# EAGLE board v1.0_not saved (EAGLE 8.2.1)

Size 183.5 x 101.27 mm. Coordinates in mm from the lower left corner, seen from the top.
Outline: 0,0 183.5,1.27 183.5,101.27 0,100 0,0
Copper layers (1*16): Top 0.035mm / dielectric 1.5mm / Bottom 0.035mm
Design rules "default": minimum track width 6mil, minimum drill 0.35mm, track to track 6mil, track to pad 6mil, pad to pad 6mil, via to via 6mil, smd to smd 6mil, copper to edge 40mil, drill to drill 6mil, minimum pad ring 10mil, minimum via ring 8mil, stop-mask expansion 4mil, vias tented up to drill 0mil, thermal gap 10mil

## Footprints (pad centres in the part's own frame; a part is rotated, then mirrored left to right if it is on the bottom)
BAT2P-13.5-CR1220 = drill 0.635 pad 1.524 long: +1 6.731,0; +2 -6.731,0 | smd 7.62 x 7.62: - 0,0
C0603 = smd 0.889 x 0.889: 1 0,0.762; 2 0,-0.762
C0402 = smd 0.5 x 0.5: 1 0,0.463; 2 0,-0.463
C0805 = smd 1.397 x 1.016: 1 0,0.889; 2 0,-0.889
AVX-A = smd 1.27 x 1.27: + -1.27,0; - 1.27,0
DO-214AA = smd 2.159 x 2.743: + -2.21,0; - 2.21,0
LED-0603 = smd 0.762 x 0.889: + -0.762,0; - 0.762,0
TH_5MM_14MM = drill 0.6: P$1 -2.54,0; P$2 2.54,0
F1206 = smd 1.27 x 1.778: 1 -1.397,0; 2 1.397,0
JST-XH-05-PACKAGE-ROUND-PAD = drill 1.016: 1 -5.08,0; 2 -2.54,0; 3 0,0; 4 2.54,0; 5 5.08,0
DCJ3P-11.6X9.6X7.0MM = drill 0.813 pad 1.524 long: + 4.381,10.16; - -4.128,10.16; CDN 1.206,10.16
MICRO-SD9+4P-SMD-16.1X14.5X1.85MM = smd 1.6 x 0.7: 1 0,2.25; 2 0,1.15; 3 0,0.05; 4 0,-1.05; 5 0,-2.15; 6 0,-3.25; 7 0,-4.35; 8 0,-5.45; 9 0,-6.55 | smd 1.6 x 1.4: G1 0.6,-7.85 | smd 2.2 x 1.4: G2 10.1,-7.85; G3 10.1,7.85 | smd 1.4 x 1.8: G4 0.5,6.95 | hole 0.9: 10.5,-4.95; 10.5,3.05
H2-2.54 = drill 0.889 pad 1.651 square: 1 0,1.27 | drill 0.889 pad 1.651: 2 0,-1.27
H16-2.54 = drill 0.889 pad 1.651 square: 1 0,-19.05 | drill 0.889 pad 1.651: 2 0,-16.51; 3 0,-13.97; 4 0,-11.43; 5 0,-8.89; 6 0,-6.35; 7 0,-3.81; 8 0,-1.27; 9 0,1.27; 10 0,3.81; 11 0,6.35; 12 0,8.89; 13 0,11.43; 14 0,13.97; 15 0,16.51; 16 0,19.05
H2X3-2.54 = drill 0.889 pad 1.651 square: 1 -1.27,2.54 | drill 0.889 pad 1.651: 2 -1.27,0; 3 -1.27,-2.54; 4 1.27,-2.54; 5 1.27,0; 6 1.27,2.54
H10-2.54 = drill 0.889 pad 1.651 square: 1 0,11.43 | drill 0.889 pad 1.651: 2 0,8.89; 3 0,6.35; 4 0,3.81; 5 0,1.27; 6 0,-1.27; 7 0,-3.81; 8 0,-6.35; 9 0,-8.89; 10 0,-11.43
L0805 = smd 1.016 x 1.397: 1 -0.889,0; 2 0.889,0
JST-XH-07-PACKAGE-ROUND-PAD = drill 1.016: 1 -7.62,0; 2 -5.08,0; 3 -2.54,0; 4 0,0; 5 2.54,0; 6 5.08,0; 7 7.62,0
RPI2 = drill 1.016 square: P$1 8.37,51.23; P$41 4.8,41.2 | drill 1.016: P$2 8.357,53.772; P$3 10.897,51.232; P$4 10.897,53.772; P$5 13.437,51.232; P$6 13.437,53.772; P$7 15.977,51.232; P$8 15.977,53.772; P$9 18.517,51.232; P$10 18.517,53.772; P$11 21.057,51.232; P$12 21.057,53.772; P$13 23.597,51.232; P$14 23.597,53.772; P$15 26.137,51.232; P$16 26.137,53.772; P$17 28.677,51.232; P$18 28.677,53.772; P$19 31.217,51.232; P$20 31.217,53.772; P$21 33.757,51.232; P$22 33.757,53.772; P$23 36.297,51.232; P$24 36.297,53.772; P$25 38.837,51.232; P$26 38.837,53.772; P$27 41.377,51.232; P$28 41.377,53.772; P$29 43.917,51.232; P$30 43.917,53.772; P$31 46.457,51.232; P$32 46.457,53.772; P$33 48.997,51.232; P$34 48.997,53.772; P$35 51.537,51.232; P$36 51.537,53.772; P$37 54.077,51.232; P$38 54.077,53.772; P$39 56.617,51.232; P$40 56.617,53.772; P$42 2.26,41.2 | hole 2.75: 3.5,3.5; 61.5,3.5; 3.5,52.5; 61.5,52.5
SOT-23 = smd 1.016 x 1.143: 1 -0.889,-1.016; 2 0.889,-1.016; 3 0,1.016
86SMX = smd 2.286 x 2.184: 1 -5.08,-2.286; 4 -5.08,2.286 | smd 3.556 x 2.184: 2 4.318,-2.286; 3 4.318,2.286
R0603 = smd 0.889 x 0.889: 1 0,0.762; 2 0,-0.762
PR-D2.3XL6.5MM = drill 0.813 octagon: 1 -4.953,0; 2 5.207,0
R0402 = smd 0.5 x 0.5: 1 0,0.463; 2 0,-0.463
SW2-12.7-12.0X3.6X3.6MM = drill 0.8 square: 1 6.35,0 | drill 0.8: 2 -6.35,0
B2,54 = smd 2.54 x 2.54: TP 0,0
SOIC127P1032X265-28N = smd 2.286 x 0.559: 1 -4.521,8.255; 2 -4.521,6.985; 3 -4.521,5.715; 4 -4.521,4.445; 5 -4.521,3.175; 6 -4.521,1.905; 7 -4.521,0.635; 8 -4.521,-0.635; 9 -4.521,-1.905; 10 -4.521,-3.175; 11 -4.521,-4.445; 12 -4.521,-5.715; 13 -4.521,-6.985; 14 -4.521,-8.255; 15 4.521,-8.255; 16 4.521,-6.985; 17 4.521,-5.715; 18 4.521,-4.445; 19 4.521,-3.175; 20 4.521,-1.905; 21 4.521,-0.635; 22 4.521,0.635; 23 4.521,1.905; 24 4.521,3.175; 25 4.521,4.445; 26 4.521,5.715; 27 4.521,6.985; 28 4.521,8.255
SOIC127P600X175-8N = smd 2.184 x 0.559: 1 -2.362,1.905; 2 -2.362,0.635; 3 -2.362,-0.635; 4 -2.362,-1.905; 5 2.362,-1.905; 6 2.362,-0.635; 7 2.362,0.635; 8 2.362,1.905
LOPY = drill 0.6: P$1 -8.89,16.51; P$2 -8.89,13.97; P$3 -8.89,11.43; P$4 -8.89,8.89; P$5 -8.89,6.35; P$6 -8.89,3.81; P$7 -8.89,1.27; P$8 -8.89,-1.27; P$9 -8.89,-3.81; P$10 -8.89,-6.35; P$11 -8.89,-8.89; P$12 -8.89,-11.43; P$13 -8.89,-13.97; P$14 -8.89,-16.51; P$15 8.89,-16.51; P$16 8.89,-13.97; P$17 8.89,-11.43; P$18 8.89,-8.89; P$19 8.89,-6.35; P$20 8.89,-3.81; P$21 8.89,-1.27; P$22 8.89,1.27; P$23 8.89,3.81; P$24 8.89,6.35; P$25 8.89,8.89; P$26 8.89,11.43; P$27 8.89,13.97; P$28 8.89,16.51
SSOP28-0.65-10.2X5.2MM = smd 0.4 x 1.5: 1 -4.225,-3.625; 2 -3.575,-3.625; 3 -2.925,-3.625; 4 -2.275,-3.625; 5 -1.625,-3.625; 6 -0.975,-3.625; 7 -0.325,-3.625; 8 0.325,-3.625; 9 0.975,-3.625; 10 1.625,-3.625; 11 2.275,-3.625; 12 2.925,-3.625; 13 3.575,-3.625; 14 4.225,-3.625; 15 4.225,3.625; 16 3.575,3.625; 17 2.925,3.625; 18 2.275,3.625; 19 1.625,3.625; 20 0.975,3.625; 21 0.325,3.625; 22 -0.325,3.625; 23 -0.975,3.625; 24 -1.625,3.625; 25 -2.275,3.625; 26 -2.925,3.625; 27 -3.575,3.625; 28 -4.225,3.625
SCK28-2.54-35.6X10MM = drill 1 pad 1.7 square: 1 -16.51,-3.81 | drill 1 pad 1.7: 2 -13.97,-3.81; 3 -11.43,-3.81; 4 -8.89,-3.81; 5 -6.35,-3.81; 6 -3.81,-3.81; 7 -1.27,-3.81; 8 1.27,-3.81; 9 3.81,-3.81; 10 6.35,-3.81; 11 8.89,-3.81; 12 11.43,-3.81; 13 13.97,-3.81; 14 16.51,-3.81; 15 16.51,3.81; 16 13.97,3.81; 17 11.43,3.81; 18 8.89,3.81; 19 6.35,3.81; 20 3.81,3.81; 21 1.27,3.81; 22 -1.27,3.81; 23 -3.81,3.81; 24 -6.35,3.81; 25 -8.89,3.81; 26 -11.43,3.81; 27 -13.97,3.81; 28 -16.51,3.81
SOP8 = smd 1 x 0.5: 1 -2.8,1.905; 2 -2.8,0.635; 3 -2.8,-0.635; 4 -2.8,-1.905; 5 2.8,-1.905; 6 2.8,-0.635; 7 2.8,0.635; 8 2.8,1.905
DIP254P762X420-16 = drill 1.118 square: 1 -7.62,17.78 | drill 1.118: 2 -7.62,15.24; 3 -7.62,12.7; 4 -7.62,10.16; 5 -7.62,7.62; 6 -7.62,5.08; 7 -7.62,2.54; 8 -7.62,0; 9 0,0; 10 0,2.54; 11 0,5.08; 12 0,7.62; 13 0,10.16; 14 0,12.7; 15 0,15.24; 16 0,17.78
SOT91P240X110-3N = smd 1.321 x 0.559: 1 -1.016,0.914; 2 -1.016,-0.914; 3 1.016,0
SOIC127P600X175-8N' = smd 1.981 x 0.533: 1 -2.464,1.905; 2 -2.464,0.635; 3 -2.464,-0.635; 4 -2.464,-1.905; 5 2.464,-1.905; 6 2.464,-0.635; 7 2.464,0.635; 8 2.464,1.905
SOIC127P600X175-14N = smd 1.981 x 0.559: 1 -2.362,3.81; 2 -2.362,2.54; 3 -2.362,1.27; 4 -2.362,0; 5 -2.362,-1.27; 6 -2.362,-2.54; 7 -2.362,-3.81; 8 2.362,-3.81; 9 2.362,-2.54; 10 2.362,-1.27; 11 2.362,0; 12 2.362,1.27; 13 2.362,2.54; 14 2.362,3.81
TO-225AA = drill 0.813 long: 1 -4.921,-8.89; 2 -2.54,-8.89; 3 -0.159,-8.89 | hole 3.302: -2.54,2.54
TO-263 = smd 1.067 x 2.159: 1 -2.54,-8.331; 2 0,-8.331; 3 2.54,-8.331 | smd 10.8 x 10.41: TAB 0,0
LM2596S = drill 0.65 pad 2.54 square: P$1 1.841,-1.968; P$2 1.841,-19.113; P$3 41.339,-1.968; P$4 41.339,-19.113 | hole 4.8: 8.445,-2.54 | hole 4.9: 34.734,-18.542
FE1.1S_SSOP-28 = smd 0.35 x 1.5: 1 -4.16,-2.7; 2 -3.52,-2.7; 3 -2.88,-2.7; 4 -2.24,-2.7; 5 -1.6,-2.7; 6 -0.96,-2.7; 7 -0.32,-2.7; 8 0.32,-2.7; 9 0.96,-2.7; 10 1.6,-2.7; 11 2.24,-2.7; 12 2.88,-2.7; 13 3.52,-2.7; 14 4.16,-2.7; 15 4.16,2.7; 16 3.52,2.7; 17 2.88,2.7; 18 2.24,2.7; 19 1.6,2.7; 20 0.96,2.7; 21 0.32,2.7; 22 -0.3,2.7; 23 -0.96,2.7; 24 -1.6,2.7; 25 -2.24,2.7; 26 -2.88,2.7; 27 -3.52,2.7; 28 -4.16,2.7
MICRO-USB5+6P-SMD-0.65-AB = smd 0.4 x 1.35: 1 -1.3,2.875; 2 -0.65,2.875; 3 0,2.875; 4 0.65,2.875; 5 1.3,2.875 | smd 1.9 x 1.9: P1 -1.2,0; P2 1.2,0 | drill 0.508 pad 1.016 long: P3 -3.625,0; P4 3.625,0 | drill 0.8: P5 -2.425,2.73; P6 2.425,2.73
X2-SMD-5.0X3.2X1.3MM = smd 1.778 x 2.032: 1 -2.159,0; 2 2.159,0

## Placement (x,y rotation side)
BAT1  cr1220  [BAT2P-13.5-CR1220]  7.62,6.99 0 top
C1  10pf  [C0603]  167.64,50.16 90 top
C2  100nf  [C0603]  161.29,48.26 0 top
C3  10pf  [C0603]  163.83,48.9 90 top
C4  10uf  [C0603]  130.81,17.14 0 top
C5  1UF 6.3V  [C0402]  152.4,40.64 0 top
C6  100nf  [C0603]  -10.79,58.42 0 top  (outside the outline)
C7  100nf  [C0603]  -15.88,58.42 0 top  (outside the outline)
C8  1UF 6.3V  [C0402]  152.4,37.47 0 top
C9  10nf  [C0805]  173.99,52.07 0 top
C10  10uf  [AVX-A]  44.45,59.69 0 top
C11  100nf  [C0603]  -20.95,58.42 0 top  (outside the outline)
C12  100nf  [C0603]  -26.04,58.42 0 top  (outside the outline)
C13  100nf  [C0603]  -31.11,58.42 0 top  (outside the outline)
C14  100nf  [C0603]  34.92,71.12 0 top
C15  100nf  [C0603]  -3.81,38.1 0 top  (outside the outline)
C16  100nf  [C0603]  -8.89,38.1 0 top  (outside the outline)
C17  4.7uf  [C0603]  -12.7,38.1 0 top  (outside the outline)
C18  100nf  [C0603]  -16.51,38.1 0 top  (outside the outline)
C19  100nf  [C0603]  -20.32,38.1 0 top  (outside the outline)
C28  100nf  [C0603]  -24.13,38.1 0 top  (outside the outline)
C29  100nf  [C0603]  -27.94,38.1 0 top  (outside the outline)
C30  4.7uf  [C0603]  -30.48,38.1 0 top  (outside the outline)
C31  100nf  [C0805]  168.28,48.26 90 top
C32  10uf  [C0805]  69.85,28.57 0 top
C33  10uf  [C0805]  122.56,27.94 0 top
C34  10uf  [C0805]  120.02,27.94 0 top
C35  100nf  [C0603]  114.3,35.56 0 top
C36  100nf  [C0603]  125.09,28.57 90 top
C38  100nf  [C0603]  140.34,50.16 90 top
C39  100nf  [C0603]  -3.17,43.18 0 top  (outside the outline)
C40  4.7uf  [C0603]  128.27,50.16 90 top
C42  100nf  [C0603]  -8.26,43.18 0 top  (outside the outline)
C43  100nf  [C0603]  -11.43,48.9 0 top  (outside the outline)
C44  4.7uf  [C0603]  -13.34,44.45 0 top  (outside the outline)
C46  100nf  [C0603]  -17.14,44.45 0 top  (outside the outline)
C47  100nf  [C0603]  -22.86,44.45 0 top  (outside the outline)
C48  4.7uf  [C0603]  -6.99,22.86 0 top  (outside the outline)
D1  28V-5A  [DO-214AA]  93.34,21.59 0 top
D2  BLUE-0603  [LED-0603]  25.4,45.72 0 top
D3  GREEN-0603  [LED-0603]  25.4,59.05 0 top
D4  RED-0603  [LED-0603]  25.4,35.56 0 top
D5  RED-0603  [LED-0603]  25.4,33.02 0 top
D6  RED-0603  [LED-0603]  25.4,63.5 0 top
D7  BLUE-0603  [LED-0603]  25.4,43.18 0 top
D8  RED-0603  [LED-0603]  25.4,30.48 0 top
D9  RED-0603  [LED-0603]  25.4,68.58 0 top
D10  RED-0603  [LED-0603]  25.4,27.94 0 top
D11  BLUE-0603  [LED-0603]  25.4,66.04 0 top
D13  RED-0603  [LED-0603]  25.4,25.4 0 top
D14  RED-0603  [LED-0603]  25.4,22.86 0 top
D15  GREEN-0603  [LED-0603]  25.4,56.52 0 top
D16  BLUE-0603  [LED-0603]  88.9,29.84 0 top
D17  GREEN-0603  [LED-0603]  25.4,53.34 0 top
D18  BLUE-0603  [LED-0603]  25.4,40.64 0 top
D19  GREEN-0603  [LED-0603]  25.4,50.8 0 top
D20  BLUE-0603  [LED-0603]  25.4,38.1 0 top
D21  GREEN-0603  [LED-0603]  25.4,48.26 0 top
F1  307010005_DIP_PPTC_4A_0310  [TH_5MM_14MM]  92.08,20.32 0 top
F2  SMD1206R500SF  [F1206]  24.13,91.44 0 top
F3  SMD1206R500SF  [F1206]  29.21,91.44 0 top
F4  SMD1206R500SF  [F1206]  45.72,91.44 0 top
F5  SMD1206R500SF  [F1206]  5.08,81.28 0 top
F6  SMD1206R500SF  [F1206]  10.16,81.28 0 top
F7  SMD1206R500SF  [F1206]  20.32,81.28 0 top
F8  SMD1206R500SF  [F1206]  25.4,81.28 0 top
F9  SMD1206R500SF  [F1206]  36.83,81.28 0 top
F10  SMD1206R500SF  [F1206]  41.91,81.28 0 top
F11  SMD1206R500SF  [F1206]  52.07,81.28 0 top
F12  SMD1206R500SF  [F1206]  57.15,81.28 0 top
F13  SMD1206R500SF  [F1206]  85.09,81.28 0 top
F14  SMD1206R500SF  [F1206]  88.9,81.28 0 top
F15  SMD1206R500SF  [F1206]  135.89,81.28 0 top
F16  SMD1206R500SF  [F1206]  140.97,81.28 0 top
F17  SMD1206R500SF  [F1206]  119.38,81.28 0 top
F18  SMD1206R500SF  [F1206]  124.46,81.28 0 top
F19  SMD1206R500SF  [F1206]  102.87,81.28 0 top
F20  SMD1206R500SF  [F1206]  107.95,81.28 0 top
F21  SMD1206R500SF  [F1206]  69.85,81.28 0 top
F22  SMD1206R500SF  [F1206]  74.93,81.28 0 top
F23  SMD1206R500SF  [F1206]  50.8,91.44 0 top
F24  SMD1206R500SF  [F1206]  63.5,91.44 0 top
F25  SMD1206R500SF  [F1206]  68.58,91.44 0 top
F26  SMD1206R500SF  [F1206]  85.09,91.44 0 top
F27  SMD1206R500SF  [F1206]  90.17,91.44 0 top
F28  SMD1206R500SF  [F1206]  3.81,91.44 0 top
F29  SMD1206R500SF  [F1206]  8.89,91.44 0 top
F30  SMD1206R500SF  [F1206]  106.68,91.44 0 top
F31  SMD1206R500SF  [F1206]  111.76,91.44 0 top
F32  SMD1206R500SF  [F1206]  127,91.44 0 top
F33  SMD1206R500SF  [F1206]  132.08,91.44 0 top
F34  SMD1206R500SF  [F1206]  146.05,91.44 0 top
F35  SMD1206R500SF  [F1206]  151.13,91.44 0 top
F36  SMD1206R500SF  [F1206]  152.4,81.28 0 top
F37  SMD1206R500SF  [F1206]  157.48,81.28 0 top
F38  SMD1206R500SF  [F1206]  49.53,72.39 0 top
F39  SMD1206R500SF  [F1206]  54.61,72.39 0 top
F40  SMD1206R500SF  [F1206]  69.85,72.39 0 top
F41  SMD1206R500SF  [F1206]  74.93,72.39 0 top
F42  SMD1206R500SF  [F1206]  25.4,72.39 0 top
F43  SMD1206R500SF  [F1206]  30.48,72.39 0 top
F44  SMD1206R500SF  [F1206]  3.81,72.39 0 top
F45  SMD1206R500SF  [F1206]  8.89,72.39 0 top
F46  SMD1206R500SF  [F1206]  92.71,72.39 0 top
F47  SMD1206R500SF  [F1206]  97.79,72.39 0 top
F48  SMD1206R500SF  [F1206]  125.73,72.39 0 top
F49  SMD1206R500SF  [F1206]  130.81,72.39 0 top
F50  SMD1206R500SF  [F1206]  109.22,72.39 0 top
F51  SMD1206R500SF  [F1206]  114.3,72.39 0 top
F52  SMD1206R500SF  [F1206]  143.51,72.39 0 top
F53  SMD1206R500SF  [F1206]  148.59,72.39 0 top
F54  SMD1206R500SF  [F1206]  160.02,72.39 0 top
F55  SMD1206R500SF  [F1206]  165.1,72.39 0 top
F56  SMD1206R500SF  [F1206]  60.33,36.83 0 top
F57  SMD1206R500SF  [F1206]  60.33,30.48 0 top
F58  SMD1206R500SF  [F1206]  60.33,24.13 0 top
F74  SMD1206R500SF  [F1206]  33.66,60.33 0 top
F75  SMD1206R500SF  [F1206]  38.73,60.96 0 top
F76  SMD1206R500SF  [F1206]  39.37,71.12 0 top
F77  SMD1206R500SF  [F1206]  44.45,71.12 0 top
F78  SMD1206R500SF  [F1206]  54.61,60.96 0 top
F79  SMD1206R500SF  [F1206]  59.69,60.96 0 top
F80  SMD1206R500SF  [F1206]  50.8,50.8 0 top
F81  SMD1206R500SF  [F1206]  55.88,50.8 0 top
F82  SMD1206R500SF  [F1206]  33.02,50.8 0 top
F83  SMD1206R500SF  [F1206]  38.1,50.8 0 top
I2C_1  JST-XH-05-PIN-ROUND-PAD  [JST-XH-05-PACKAGE-ROUND-PAD]  8.89,85.09 0 top
I2C_2  JST-XH-05-PIN-ROUND-PAD  [JST-XH-05-PACKAGE-ROUND-PAD]  25.4,85.09 0 top
I2C_3  JST-XH-05-PIN-ROUND-PAD  [JST-XH-05-PACKAGE-ROUND-PAD]  41.91,85.09 0 top
I2C_4  JST-XH-05-PIN-ROUND-PAD  [JST-XH-05-PACKAGE-ROUND-PAD]  58.42,85.09 0 top
I2C_5  JST-XH-05-PIN-ROUND-PAD  [JST-XH-05-PACKAGE-ROUND-PAD]  74.93,85.09 0 top
I2C_6  JST-XH-05-PIN-ROUND-PAD  [JST-XH-05-PACKAGE-ROUND-PAD]  91.44,85.09 0 top
I2C_7  JST-XH-05-PIN-ROUND-PAD  [JST-XH-05-PACKAGE-ROUND-PAD]  140.97,85.09 0 top
I2C_8  JST-XH-05-PIN-ROUND-PAD  [JST-XH-05-PACKAGE-ROUND-PAD]  124.46,85.09 0 top
I2C_9  JST-XH-05-PIN-ROUND-PAD  [JST-XH-05-PACKAGE-ROUND-PAD]  107.95,85.09 0 top
I2C_10  JST-XH-05-PIN-ROUND-PAD  [JST-XH-05-PACKAGE-ROUND-PAD]  157.48,85.09 0 top
I_UART_HUB_1  JST-XH-05-PIN-ROUND-PAD  [JST-XH-05-PACKAGE-ROUND-PAD]  132.08,76.2 0 top
J1  DC-044-A  [DCJ3P-11.6X9.6X7.0MM]  121.92,1.91 0 top
J2  MICROSD-9P  [MICRO-SD9+4P-SMD-16.1X14.5X1.85MM]  169.54,66.67 0 top
J3  2p-2.54  [H2-2.54]  116.2,59.69 0 top
J4  2p-2.54  [H2-2.54]  109.22,67.31 0 top
J5  16p-2.54  [H16-2.54]  132.08,67.31 90 top
J6  16p-2.54  [H16-2.54]  132.08,63.5 90 top
J7  2x3p-2.54  [H2X3-2.54]  158.75,64.77 90 top
J8  2p-2.54  [H2-2.54]  109.22,60.96 0 top
J9  10p-2.54  [H10-2.54]  151.13,-3.81 90 top  (outside the outline)
J10  10p-2.54  [H10-2.54]  125.73,-3.81 90 top  (outside the outline)
J11  10p-2.54  [H10-2.54]  151.13,-6.35 90 top  (outside the outline)
J12  10p-2.54  [H10-2.54]  125.73,-6.35 90 top  (outside the outline)
L1  330R-1500MA  [L0805]  180.34,46.35 0 top
L2  330R-1500MA  [L0805]  99.06,53.98 0 top
L3  330R-1500MA  [L0805]  50.8,35.56 0 top
LOPY_I2C  JST-XH-05-PIN-ROUND-PAD  [JST-XH-05-PACKAGE-ROUND-PAD]  59.69,64.77 0 top
LOPY_SPI  JST-XH-07-PIN-ROUND-PAD  [JST-XH-07-PACKAGE-ROUND-PAD]  40.64,64.77 0 top
LOPY_UART0  JST-XH-05-PIN-ROUND-PAD  [JST-XH-05-PACKAGE-ROUND-PAD]  55.88,54.61 0 top
LOPY_UART1  JST-XH-05-PIN-ROUND-PAD  [JST-XH-05-PACKAGE-ROUND-PAD]  38.1,54.61 0 top
PCB1  RPI2  [RPI2]  96.52,1.27 0 top
PI_ADC_1  JST-XH-07-PIN-ROUND-PAD  [JST-XH-07-PACKAGE-ROUND-PAD]  77.47,76.2 0 top
PI_ADC_2  JST-XH-07-PIN-ROUND-PAD  [JST-XH-07-PACKAGE-ROUND-PAD]  54.61,76.2 0 top
PI_ADC_3  JST-XH-07-PIN-ROUND-PAD  [JST-XH-07-PACKAGE-ROUND-PAD]  33.02,76.2 0 top
PI_ADC_4  JST-XH-07-PIN-ROUND-PAD  [JST-XH-07-PACKAGE-ROUND-PAD]  11.43,76.2 0 top
PI_RS_485  JST-XH-05-PIN-ROUND-PAD  [JST-XH-05-PACKAGE-ROUND-PAD]  97.79,76.2 0 top
PI_UART  JST-XH-05-PIN-ROUND-PAD  [JST-XH-05-PACKAGE-ROUND-PAD]  115.57,76.2 0 top
PI_UART_HUB_2  JST-XH-05-PIN-ROUND-PAD  [JST-XH-05-PACKAGE-ROUND-PAD]  148.59,76.2 0 top
PI_UART_HUB_3  JST-XH-05-PIN-ROUND-PAD  [JST-XH-05-PACKAGE-ROUND-PAD]  165.1,76.2 0 top
Q2  SSM3J328R,LF  [SOT-23]  55.88,42.55 0 top
Q3  6pF@32.7680kHz  [86SMX]  175.9,53.98 0 top
Q4  BSS138W-7-F  [SOT-23]  51.44,42.55 0 top
Q5  SSM3J328R,LF  [SOT-23]  60.33,42.55 0 top
R1  330R  [R0603]  -1.91,52.07 0 top
R2  10K 1/10W  [R0603]  165.1,46.99 90 top
R3  330R  [R0603]  -6.99,52.07 0 top  (outside the outline)
R4  4.7K  [R0603]  -12.06,52.07 0 top  (outside the outline)
R5  1K  [R0603]  -17.14,52.07 0 top  (outside the outline)
R6  220R  [PR-D2.3XL6.5MM]  33.66,33.02 0 top
R7  330K  [PR-D2.3XL6.5MM]  122.56,17.14 0 top
R8  10K  [R0603]  -22.23,52.07 0 top  (outside the outline)
R9  100R  [PR-D2.3XL6.5MM]  33.66,30.48 0 top
R10  100R  [PR-D2.3XL6.5MM]  31.11,69.85 0 top
R11  1K  [R0603]  -27.3,52.07 0 top  (outside the outline)
R12  4.7K  [R0603]  -32.38,52.07 0 top  (outside the outline)
R13  10K  [R0603]  44.45,57.78 0 top
R14  4.7K  [R0603]  135.89,50.16 90 top
R15  10K  [R0603]  132.08,50.16 90 top
R18  10K  [R0603]  159.38,29.21 0 top
R19  10K  [R0603]  170.81,46.99 90 top
R20  15K 1/10W  [R0603]  114.3,31.11 0 top
R21  220R  [PR-D2.3XL6.5MM]  34.29,24.77 0 top
R22  100R  [PR-D2.3XL6.5MM]  33.66,22.23 0 top
R23  330R  [R0603]  -25.4,31.75 0 top  (outside the outline)
R24  330R  [R0603]  -30.48,31.75 0 top  (outside the outline)
R25  4.7K  [R0603]  151.13,50.16 90 top
R26  10K  [R0603]  146.69,50.16 90 top
R27  10K  [R0603]  98.42,32.38 0 top
R28  2.7K 1/16W  [R0402]  128.27,35.56 0 top
R29  330R  [R0603]  97.79,24.77 0 top
R30  330R  [R0603]  28.57,53.34 90 top
R31  330R  [R0603]  28.57,40.64 90 top
R32  330R  [R0603]  28.57,50.8 90 top
R33  330R  [R0603]  28.57,38.1 90 top
R34  330R  [R0603]  28.57,48.26 90 top
R35  1K  [R0603]  28.57,66.04 90 top
R36  1M  [R0603]  153.03,29.84 0 top
R37  3.9K  [R0603]  152.4,34.29 0 top
R38  3.9K  [R0603]  150.5,31.11 0 top
R39  100K 1/10W  [R0603]  25.4,60.96 90 top
R40  100K 1/10W  [R0603]  50.8,38.73 90 top
SPI_1  JST-XH-07-PIN-ROUND-PAD  [JST-XH-07-PACKAGE-ROUND-PAD]  11.43,95.25 0 top
SPI_2  JST-XH-07-PIN-ROUND-PAD  [JST-XH-07-PACKAGE-ROUND-PAD]  31.75,95.25 0 top
SPI_3  JST-XH-07-PIN-ROUND-PAD  [JST-XH-07-PACKAGE-ROUND-PAD]  52.07,95.25 0 top
SPI_4  JST-XH-07-PIN-ROUND-PAD  [JST-XH-07-PACKAGE-ROUND-PAD]  72.39,95.25 0 top
SPI_5  JST-XH-07-PIN-ROUND-PAD  [JST-XH-07-PACKAGE-ROUND-PAD]  93.98,95.25 0 top
SPI_6  JST-XH-07-PIN-ROUND-PAD  [JST-XH-07-PACKAGE-ROUND-PAD]  115.57,95.25 0 top
SPI_7  JST-XH-07-PIN-ROUND-PAD  [JST-XH-07-PACKAGE-ROUND-PAD]  137.16,95.25 0 top
SPI_8  JST-XH-07-PIN-ROUND-PAD  [JST-XH-07-PACKAGE-ROUND-PAD]  160.02,95.25 0 top
SW1  SW-200D  [SW2-12.7-12.0X3.6X3.6MM]  87.63,38.1 0 top
SW2  SW-200D  [SW2-12.7-12.0X3.6X3.6MM]  71.12,44.45 0 top
SW3  SW-200D  [SW2-12.7-12.0X3.6X3.6MM]  71.12,38.1 0 top
SW4  SW-200D  [SW2-12.7-12.0X3.6X3.6MM]  71.75,55.88 0 top
SW5  SW-200D  [SW2-12.7-12.0X3.6X3.6MM]  87.63,55.88 0 top
SW6  SW-200D  [SW2-12.7-12.0X3.6X3.6MM]  87.63,44.45 0 top
SW7  SW-200D  [SW2-12.7-12.0X3.6X3.6MM]  71.12,50.16 0 top
SW8  SW-200D  [SW2-12.7-12.0X3.6X3.6MM]  87.63,49.53 0 top
TP1  TPB2,54  [B2,54]  37.47,46.99 0 top
TP2  TPB2,54  [B2,54]  50.16,46.99 0 top
TP3  TPB2,54  [B2,54]  46.99,46.99 0 top
TP4  TPB2,54  [B2,54]  53.34,46.99 0 top
TP5  TPB2,54  [B2,54]  34.29,46.99 0 top
TP6  TPB2,54  [B2,54]  43.81,46.99 0 top
TP7  TPB2,54  [B2,54]  40.64,46.99 0 top
U1  MCP23017-E/SO  [SOIC127P1032X265-28N]  167,36.2 0 top
U2  MCP79412-I/SN  [SOIC127P600X175-8N]  165.1,53.98 0 top
U3  LOPY  [LOPY]  12.7,43.18 0 top
U5  FT232RL-SSOP28  [SSOP28-0.65-10.2X5.2MM]  147.96,44.45 0 top
U6  FT232RL-SSOP28  [SSOP28-0.65-10.2X5.2MM]  137.16,44.45 0 top
U7  2x14p-2.54  [SCK28-2.54-35.6X10MM]  87.63,64.77 0 top
U8  BR24G32-3  [SOP8]  147.96,36.2 0 top
U10  74HC139N  [DIP254P762X420-16]  181.61,31.75 0 top
U11  BZX84C30  [SOT91P240X110-3N]  92.71,26.04 0 top
U12  SP483ECN-L  [SOIC127P600X175-8N']  102.87,31.75 0 top
U13  FT232RL-SSOP28  [SSOP28-0.65-10.2X5.2MM]  125.73,43.81 0 top
U14  FT232RL-SSOP28  [SSOP28-0.65-10.2X5.2MM]  114.94,43.81 0 top
U15  FT232RL-SSOP28  [SSOP28-0.65-10.2X5.2MM]  103.5,43.81 0 top
U$1  MCP3424-E/SL  [SOIC127P600X175-14N]  156.84,36.2 0 top
U$2  MCP3424-E/SL  [SOIC127P600X175-14N]  156.84,46.35 0 top
U$3  C106DG  [TO-225AA]  111.76,20.32 0 top
U$4  MCR29300  [TO-263]  83.82,10.16 0 top
U$5  LM2596S  [LM2596S]  34.29,21.59 0 top
U$6  FE1.1S  [FE1.1S_SSOP-28]  121.28,33.66 0 top
USB1  ZX62-B-5PA  [MICRO-USB5+6P-SMD-0.65-AB]  182.25,95.25 90 top
USB3  ZX62-B-5PA  [MICRO-USB5+6P-SMD-0.65-AB]  182.25,87.63 90 top
Y2  12MHZ  [X2-SMD-5.0X3.2X1.3MM]  121.92,24.13 0 top

## Library data of the parts
BAT1 = Seeed-Connector -2016
C1 C3 = Seeed-Capacitor; MPN: CC0603JRNPO9BN100
C2 C6 C7 C11-C16 C19 C28 C29 C35 C36 C38 C39 C42 C43 C46 C47 = Seeed-Capacitor-2016; MPN: CC0603KRX7R9BB104
C4 = Seeed-Capacitor; MPN: CC0603KRX5R6BB106
C5 C8 = Seeed-Capacitor-2016; MPN: CC0402KRX5R5BB105
C9 = Seeed-Capacitor-2016; MPN: CC0805JRX7R9BB103
C10 = Seeed-Capacitor; MPN: TAJA106K010RNJ
C17 C30 C40 C44 C48 = Seeed-Capacitor-2016; MPN: CC0603KRX5R6BB475
C18 = Seeed-Capacitor; MPN: CC0603KRX7R9BB104
C31 = Seeed-Capacitor; MPN: CC0805KRX7R9BB104
C32-C34 = Seeed-Capacitor-2016; MPN: CC0805KKX5R8BB106
D1 = Seeed-Diode-2016; MPN: SS54B
D2 D7 D16 D18 D20 = Seeed-LED; MPN: 19-217-BHC-ZL1M2RY-3T
D3 D15 D17 D19 D21 = Seeed-LED; MPN: 19-217-G7C-AN1P2-3T
D4-D6 D8-D10 D13 D14 = Seeed-LED-2016; MPN: 19-217-R6C-AL1M2VY-3T
D11 = Seeed-LED-2016; MPN: 19-217-BHC-ZL1M2RY-3T
F1 = Seeed-OPL-2017-01-Fuse-Akita
F2-F58 F74-F83 = Seeed-Fuse; MPN: SMD1206R500SF
I2C_1-I2C_10 I_UART_HUB_1 LOPY_I2C LOPY_SPI LOPY_UART0 LOPY_UART1 PI_ADC_1-PI_ADC_4 PI_RS_485 PI_UART PI_UART_HUB_2 PI_UART_HUB_3 SPI_1-SPI_8 = Rembrandt Electronics - JST XH Connectors v1-0 2
J1 = Seeed-Connector -2016; MPN: JACK-DC-044-A
J2 = Seeed-Connector
J3 J4 = Seeed-Connector; MPN: P125-1102A0BS116A1
J5 J6 = Seeed-Connector; MPN: P125-1116A0BS116AX
J7 = Seeed-Connector -2016; MPN: P125-12A1BS116A1
J8 = Seeed-Connector -2016; MPN: RF130-1023ABS0741
J9-J12 = Seeed-Connector; MPN: F185-1110A1BSYA1
L1-L3 = Seeed-Inductor-2016; MPN: BLM21PG331SN1D
PCB1 = e14_Rpi2_RevA
Q2 Q5 = Seeed-Transistor; MPN: SSM3J328R,LF
Q3 = crystal
Q4 = Seeed-Transistor; MPN: BSS138W-7-F
R1 R3 R23 R24 R29-R34 = Seeed-Resistor; MPN: RC0603FR-07330RL
R2 = Seeed-Resistor; MPN: RC0603JR-0710KL
R4 R12 R14 R25 = Seeed-Resistor; MPN: RC0603JR-074K7L
R5 R11 R35 = Seeed-Resistor-2016; MPN: RC0603FR-071KL
R6 R21 = Seeed-Resistor; MPN: FHCFR-1/4W-221J
R7 = Seeed-Resistor; MPN: FHCFR-1/4W-334J
R8 R13 R15 R18 R19 R26 R27 = Seeed-Resistor; MPN: RC0603FR-0710KL
R9 R10 R22 = Seeed-Resistor; MPN: FHCFR-1/4W-101J
R20 = Seeed-Resistor; MPN: RC0603FR-0715KL
R28 = Seeed-Resistor-2016; MPN: RC0402FR-072K7L
R36 = Seeed-Resistor-2016; MPN: RC0603FR-071ML
R37 R38 = Seeed-Resistor-2016; MPN: RC0603JR-073K9L
R39 R40 = Seeed-Resistor; MPN: RC0603JR-07100KL
SW1-SW4 = Seeed-Switch; MPN: SW-200D
SW5-SW8 = Seeed-Switch-2016; MPN: SW-200D
TP1-TP7 = testpad
U1 = imported-parts; MPN: MCP23017-E/SO; OC_FARNELL: 1332087; OC_NEWARK: 34M7442; PACKAGE: SOIC-28; SUPPLIER: Microchip
U2 = imported-parts; MPN: MCP79412-I/SN; OC_FARNELL: 2103565; OC_NEWARK: 94T5863; PACKAGE: SOIC-8; SUPPLIER: Microchip
U3 = pycom
U5 U6 U13-U15 = Seeed-IC; MPN: FT232RL
U7 = Seeed-Connector; MPN: ICX-28P
U8 = farnell-parts
U10 = 74HC139N; MPN: 74HC139N; OC_FARNELL: 380556; OC_NEWARK: 07WX3674; PACKAGE: DIP-16; SUPPLIER: NXP
U11 = Diodes_Inc_By_element14_Batch_1; MPN: BZX84C30; OC_FARNELL: 1902456; OC_NEWARK: -; PACKAGE: SOT-23-3; SUPPLIER: DIODES INC.
U12 = SP483; MPN: SP483ECN-L; OC_FARNELL: 9387129; OC_NEWARK: 24R0561; PACKAGE: SOIC-8; SUPPLIER: Exar
U$1 U$2 = MCP3424; MPN: MCP3424-E/SL; OC_FARNELL: 1630424; OC_NEWARK: 54M4871; PACKAGE: SOIC-14; SUPPLIER: Microchip
U$3 = C106DG_thyristor
U$4 = mic29300
U$5 = lm2596s_DC-DC
U$6 = FE1.1s
USB1 USB3 = Seeed-Connector -2016; MPN: ZX62-B-5PA
Y2 = Seeed-Crystal Oscillator-2016; MPN: 5032/2P

## Nets
3V3: C19.1 F57.2 J7.3 J7.4 R36.2 R37.2 R38.2 U8.8
3V3_SMOOTH: C14.2 F3.1 F6.1 F8.1 F10.1 F12.1 F14.1 F16.1 F18.1 F20.1 F22.1 F23.1 F25.1 F27.1 F29.1 F31.1 F33.1 F35.1 F37.1 F39.1 F41.1 F43.1 F45.1 F47.1 F49.1 F51.1 F53.1 F55.1 L2.2 R10.2 TP3.TP
3V3_SMOOTH1: F39.2 PI_ADC_2.2
3V3_SMOOTH3: F41.2 PI_ADC_1.2
3V3_SMOOTH5: F43.2 PI_ADC_3.2
3V3_SMOOTH7: F45.2 PI_ADC_4.2
5V35: C4.2 R7.2 TP4.TP U$4.1 U$5.P$3
5V_USB_HUB: C32.1 R4.2 R12.2 R14.2 R25.2 R35.2 U$6.20 USB1.1
+3V3: C2.2 C11.2 C12.2 L2.1 PCB1.P$1 PCB1.P$17 R2.2 R9.2 R18.2 R19.2 TP2.TP U1.9 U2.8
+3V3_SMOOTH: C5.1 C6.2 C7.2 C8.1 U$1.6 U$2.6
+5V: C10.+ F5.1 F7.1 F9.1 F11.1 F13.1 F15.1 F17.1 F19.1 F21.1 F36.1 F74.1 F76.1 F78.1 F80.1 F82.1 Q2.3 R6.2 R39.2 TP1.TP U3.P$28 U7.5 U7.24 U$4.3
+5V1: F38.2 PI_ADC_2.1
+5V3: F40.2 PI_ADC_1.1
+5V5: F42.2 PI_ADC_3.1
+5V7: F44.2 PI_ADC_4.1
+24V: D1.- R5.2 U11.3 U$3.1 U$5.P$1
+24V_UNREG_IN: F1.P$1 J1.+
ADC1+: PI_ADC_1.3 U$1.1
ADC1-: PI_ADC_1.4 U$1.2
ADC2+: PI_ADC_1.5 U$1.3
ADC2-: PI_ADC_1.6 U$1.4
ADC3+: PI_ADC_2.3 U$1.11
ADC3-: PI_ADC_2.4 U$1.12
ADC4+: PI_ADC_2.5 U$1.13
ADC4-: PI_ADC_2.6 U$1.14
ADC5+: PI_ADC_3.3 U$2.1
ADC5-: PI_ADC_3.4 U$2.2
ADC6+: PI_ADC_3.5 U$2.3
ADC6-: PI_ADC_3.6 U$2.4
ADC7+: PI_ADC_4.3 U$2.11
ADC7-: PI_ADC_4.4 U$2.12
ADC8+: PI_ADC_4.5 U$2.13
ADC8-: PI_ADC_4.6 U$2.14
FTDI2_3V3: C29.2 U5.17
FTDI2_CBUS1: R23.2 U5.23
FTDI2_RE: R27.1 U5.14 U12.2
FTDI2_RXD: U5.5 U12.1
FTDI2_TE: U5.13 U12.3
FTDI2_TXD: U5.1 U12.4
FTDI_3V3: C16.2 C39.2 C43.2 C47.2 U6.17 U13.17 U14.17 U15.17
FTID2_CBUS2: R24.2 U5.22
GND: BAT1.- C1.2 C2.1 C3.2 C4.1 C9.1 C10.- C11.1 C12.1 C13.1 C15.1 C16.1 C17.1 C18.1 C19.2 C28.1 C29.1 C30.1 C31.1 C32.2 C33.1 C34.1 C35.1 C36.1 C38.1 C39.1 C40.1 C42.1 C43.1 C44.1 C46.1 C47.1 C48.1 I2C_1.5 I2C_2.5 I2C_3.5 I2C_4.5 I2C_5.5 I2C_6.5 I2C_7.5 I2C_8.5 I2C_9.5 I2C_10.5 I_UART_HUB_1.5 J1.- J1.CDN J2.6 J2.G1 J2.G2 J2.G3 J2.G4 J3.2 J7.2 J7.5 J8.2 L3.1 LOPY_I2C.5 LOPY_SPI.7 LOPY_UART0.5 LOPY_UART1.5 PCB1.P$6 PCB1.P$9 PCB1.P$14 PCB1.P$20 PCB1.P$25 PCB1.P$30 PCB1.P$34 PCB1.P$39 PI_ADC_1.7 PI_ADC_2.7 PI_ADC_3.7 PI_ADC_4.7 PI_RS_485.5 PI_UART.5 PI_UART_HUB_2.5 PI_UART_HUB_3.5 Q4.2 Q5.1 R8.2 R13.2 R15.2 R20.1 R26.2 R28.1 R40.1 SPI_1.7 SPI_2.7 SPI_3.7 SPI_4.7 SPI_5.7 SPI_6.7 SPI_7.7 SPI_8.7 SW1.2 SW3.2 SW4.2 TP7.TP U1.10 U1.15 U1.16 U1.17 U2.4 U3.P$27 U5.7 U5.18 U5.21 U5.25 U5.26 U6.7 U6.18 U6.21 U6.25 U6.26 U7.3 U7.26 U8.1 U8.2 U8.3 U8.4 U10.8 U12.5 U13.7 U13.18 U13.21 U13.25 U13.26 U14.7 U14.18 U14.21 U14.25 U14.26 U15.7 U15.18 U15.21 U15.25 U15.26 U$3.2 U$4.2 U$5.P$2 U$5.P$4 U$6.1 USB1.5 USB3.5
GNDA: C5.2 C6.1 C7.1 C8.2 C14.1 L3.2 U$1.5 U$1.9 U$1.10 U$2.5 U$2.9
ID_SC: PCB1.P$28 R37.1 U8.6
ID_SD: PCB1.P$27 R38.1 U8.5
LOPY_3V3: F56.2 F75.1 F77.1 F79.1 F81.1 F83.1 J2.4 J4.1 R22.2 SW2.1 U3.P$26 U7.4 U7.25
LOPY_CS1: LOPY_SPI.3 U3.P$10
LOPY_CS2: J2.2 U3.P$16
LOPY_MISO: J2.7 J4.2 LOPY_SPI.5 PCB1.P$31 U3.P$14
LOPY_MOSI: J2.3 LOPY_SPI.4 U3.P$13
LOPY_P2: J3.1 PCB1.P$29 U3.P$4
LOPY_P15: U3.P$17 U7.6 U7.23
LOPY_P16: U3.P$18 U7.7 U7.22
LOPY_P17: U3.P$19 U7.8 U7.21
LOPY_P18: U3.P$20 U7.9 U7.20
LOPY_P19: U3.P$21 U7.10 U7.19
LOPY_P20: U3.P$22 U7.11 U7.18
LOPY_P21: U3.P$23 U7.12 U7.17
LOPY_P22: U3.P$24 U7.13 U7.16
LOPY_P23: U3.P$25 U7.14 U7.15
LOPY_RST: U3.P$1
LOPY_RX0: LOPY_UART0.4 U3.P$2 U6.1
LOPY_RX1: LOPY_UART1.3 U3.P$6
LOPY_SCL/CLK: J2.5 LOPY_I2C.4 LOPY_SPI.6 U3.P$12
LOPY_SDA: LOPY_I2C.3 U3.P$11
LOPY_TX0: LOPY_UART0.3 U3.P$3 U6.5
LOPY_TX1: LOPY_UART1.4 U3.P$5
LOPY_USB_5V: C15.2 C17.2 D2.+ D3.+ L1.2 R11.2 TP5.TP U6.4 U6.20
N$1: R2.1 U1.18
N$2: U1.19
N$3: U1.20
N$4: F6.2 I2C_1.2
N$5: R4.1 R8.1 U13.19
N$6: D2.- R1.1
N$7: D3.- R3.1
N$8: J5.1 J6.1 U1.21
N$9: R1.2 U6.23
N$10: R3.2 U6.22
N$11: F51.2 PI_UART.2
N$12: J5.2 J6.2 U1.22
N$13: J5.3 J6.3 U1.23
N$14: J5.4 J6.4 U1.24
N$15: J5.5 J6.5 U1.25
N$16: J5.6 J6.6 U1.26
N$17: F21.2 I2C_5.1
N$18: J2.1
N$19: J5.7 J6.7 U1.27
N$20: J2.8
N$21: J2.9
N$22: J5.8 J6.8 U1.28
N$23: R12.1 R13.1 U15.19
N$24: J5.9 J6.9 U1.1
N$25: F46.2 PI_RS_485.1
N$26: J5.10 J6.10 U1.2
N$27: J5.11 J6.11 U1.3
N$28: F2.2 SPI_2.1
N$29: D9.+ R10.1
N$30: D8.+ R9.1
N$31: R14.1 R15.1 U14.19
N$32: D6.+ R7.1
N$33: D5.+ R6.1
N$34: D4.+ R5.1
N$35: J5.12 J6.12 U1.4
N$36: J5.13 J6.13 U1.5
N$37: J5.14 J6.14 U1.6
N$38: F50.2 PI_UART.1
N$39: J5.15 J6.15 U1.7
N$40: J5.16 J6.16 U1.8
N$41: F78.2 LOPY_UART0.1
N$42: F79.2 LOPY_UART0.2
N$43: F80.2 LOPY_UART1.1
N$44: F81.2 LOPY_UART1.2
N$45: F82.2 LOPY_I2C.1
N$46: F3.2 SPI_2.2
N$47: F74.2 LOPY_SPI.1
N$48: F5.2 I2C_1.1
N$49: F8.2 I2C_2.2
N$50: F7.2 I2C_2.1
N$51: F10.2 I2C_3.2
N$52: F9.2 I2C_3.1
N$53: F12.2 I2C_4.2
N$54: F11.2 I2C_4.1
N$55: F22.2 I2C_5.2
N$56: F14.2 I2C_6.2
N$57: F4.2 SPI_3.1
N$58: F23.2 SPI_3.2
N$59: F24.2 SPI_4.1
N$60: F25.2 SPI_4.2
N$61: D11.+ R35.1
N$62: F47.2 PI_RS_485.2
N$63: F76.2 U7.1 U7.28
N$64: F77.2 U7.2 U7.27
N$65: D7.+ D15.+ SW5.1
N$66: F75.2 LOPY_SPI.2
N$67: F83.2 LOPY_I2C.2
N$68: D1.+ F1.P$2
N$69: F26.2 SPI_5.1
N$70: F27.2 SPI_5.2
N$71: F30.2 SPI_6.1
N$72: F31.2 SPI_6.2
N$73: F28.2 SPI_1.1
N$74: F29.2 SPI_1.2
N$75: F32.2 SPI_7.1
N$76: F33.2 SPI_7.2
N$77: D10.+ R11.1
N$78: F13.2 I2C_6.1
N$79: F49.2 I_UART_HUB_1.2
N$80: C18.2 R20.2 U11.1 U$3.3
N$81: D4.- D5.- D6.- SW1.1
N$82: D14.+ R22.1
N$83: D10.- D11.- D14.- SW4.1
N$84: F48.2 I_UART_HUB_1.1
N$85: D7.- R23.1
N$86: D8.- D9.- D13.- SW3.1
N$87: D13.+ R21.1
N$88: F53.2 PI_UART_HUB_2.2
N$89: F16.2 I2C_7.2
N$90: F52.2 PI_UART_HUB_2.1
N$91: F55.2 PI_UART_HUB_3.2
N$92: D15.- R24.1
N$93: F54.2 PI_UART_HUB_3.1
N$94: D20.+ D21.+ SW6.1
N$95: D18.+ D19.+ SW7.1
N$96: D16.+ D17.+ SW8.1
N$97: J8.1 R36.1 TP6.TP U8.7
N$98: F34.2 SPI_8.1
N$99: R25.1 R26.1 U5.19
N$100: D16.- R29.1
N$101: D17.- R30.1
N$102: U$6.2 Y2.1
N$103: U$6.3 Y2.2
N$104: R28.2 U$6.14
N$105: C35.2 U$6.28
N$106: C36.2 U$6.13
N$107: C34.2 U$6.21
N$108: C33.2 U$6.12
N$109: R29.2 U13.23
N$110: R30.2 U13.22
N$111: D18.- R31.1
N$112: D19.- R32.1
N$113: R31.2 U14.23
N$114: R32.2 U14.22
N$115: D20.- R33.1
N$116: D21.- R34.1
N$117: R33.2 U15.23
N$118: R34.2 U15.22
N$119: F15.2 I2C_7.1
N$120: F18.2 I2C_8.2
N$121: F35.2 SPI_8.2
N$122: Q2.2 Q5.3
N$123: Q2.1 Q4.3 R39.1
N$124: F17.2 I2C_8.1
N$125: F20.2 I2C_9.2
N$126: F19.2 I2C_9.1
N$127: F37.2 I2C_10.2
N$128: F36.2 I2C_10.1
N$129: F56.1
N$130: F58.1
N$131: F57.1
PI_5V: C13.2 C28.2 C30.2 C31.2 C38.2 C40.2 C42.2 C44.2 C46.2 C48.2 F2.1 F4.1 F24.1 F26.1 F28.1 F30.1 F32.1 F34.1 F38.1 F40.1 F42.1 F44.1 F46.1 F48.1 F50.1 F52.1 F54.1 F58.2 J7.1 J7.6 PCB1.P$2 PCB1.P$4 Q5.2 R21.2 R27.2 SW5.2 SW6.2 SW7.2 SW8.2 U5.4 U5.20 U10.16 U12.8 U13.4 U13.20 U14.4 U14.20 U15.4 U15.20
PI_PWR_CTRL: Q4.1 R40.2 SW2.2 U3.P$15
RPI_CS1: SPI_1.3 U10.4
RPI_CS2: SPI_2.3 U10.5
RPI_CS3: SPI_3.3 U10.6
RPI_CS4: SPI_4.3 U10.7
RPI_CS5: SPI_5.3 U10.12
RPI_CS6: SPI_6.3 U10.11
RPI_CS7: SPI_7.3 U10.10
RPI_CS8: SPI_8.3 U10.9
RS485_A: PI_RS_485.3 U12.6
RS485_B: PI_RS_485.4 U12.7
RS485_DM: U5.16 U$6.10
RS485_DP: U5.15 U$6.11
RTC_BATT: BAT1.+1 BAT1.+2 U2.3
SCL_3V3: I2C_1.4 I2C_2.4 I2C_3.4 I2C_4.4 I2C_5.4 I2C_6.4 I2C_7.4 I2C_8.4 I2C_9.4 I2C_10.4 PCB1.P$5 R18.1 U1.12 U2.6 U$1.8 U$2.8
SCLK: PCB1.P$7
SDA_3V3: I2C_1.3 I2C_2.3 I2C_3.3 I2C_4.3 I2C_5.3 I2C_6.3 I2C_7.3 I2C_8.3 I2C_9.3 I2C_10.3 PCB1.P$3 R19.1 U1.13 U2.5 U$1.7 U$2.7
SPI0_CS0: PCB1.P$24 U10.1
SPI0_CS1: PCB1.P$26 U10.15
SPI_GPIO1: PCB1.P$11 U10.2
SPI_GPIO2: PCB1.P$13 U10.14
SPI_GPIO3: PCB1.P$15 U10.3
SPI_GPIO4: PCB1.P$16 U10.13
SPI_MISO: PCB1.P$21 SPI_1.5 SPI_2.5 SPI_3.5 SPI_4.5 SPI_5.5 SPI_6.5 SPI_7.5 SPI_8.5
SPI_MOSI: PCB1.P$19 SPI_1.4 SPI_2.4 SPI_3.4 SPI_4.4 SPI_5.4 SPI_6.4 SPI_7.4 SPI_8.4
SPI_SCLK: PCB1.P$23 SPI_1.6 SPI_2.6 SPI_3.6 SPI_4.6 SPI_5.6 SPI_6.6 SPI_7.6 SPI_8.6
UART1_DM: U13.16 U$6.8
UART1_DP: U13.15 U$6.9
UART1_RDX: I_UART_HUB_1.4 U13.1
UART1_TDX: I_UART_HUB_1.3 U13.5
UART2_DM: U14.16 U$6.6
UART2_DP: U14.15 U$6.7
UART2_RDX: PI_UART_HUB_2.4 U14.1
UART2_TDX: PI_UART_HUB_2.3 U14.5
UART3_DM: U15.16 U$6.4
UART3_DP: U15.15 U$6.5
UART3_RDX: PI_UART_HUB_3.4 U15.1
UART3_TDX: PI_UART_HUB_3.3 U15.5
UART_RX: PCB1.P$10 PI_UART.4
UART_TDX: PCB1.P$8 PI_UART.3
USB_DM: U6.16 USB3.2
USB_DP: U6.15 USB3.3
USB_HUB_DM: U$6.15 USB1.2
USB_HUB_DP: U$6.16 USB1.3
USB_HUB_VD33_O: U$6.17 U$6.18 U$6.19 U$6.26
VBUS: C9.2 L1.1 USB3.1
X1_RTC: C1.1 Q3.4 U2.1
X2_RTC: C3.1 Q3.1 U2.2

## Tracks (layer width: path | path; a pad name or v marks a point on that pad's centre or on a via)
3V3  (7 unrouted)
3V3_SMOOTH  (30 unrouted)
3V3_SMOOTH1  (1 unrouted)
3V3_SMOOTH3  (1 unrouted)
3V3_SMOOTH5  (1 unrouted)
3V3_SMOOTH7  (1 unrouted)
5V35  (4 unrouted)
5V_USB_HUB  (7 unrouted)
+3V3  (12 unrouted)
+3V3_SMOOTH  (5 unrouted)
+5V  (23 unrouted)
+5V1  (1 unrouted)
+5V3  (1 unrouted)
+5V5  (1 unrouted)
+5V7  (1 unrouted)
+24V  (4 unrouted)
+24V_UNREG_IN  (1 unrouted)
ADC1+  (1 unrouted)
ADC1-  (1 unrouted)
ADC2+  (1 unrouted)
ADC2-  (1 unrouted)
ADC3+  (1 unrouted)
ADC3-  (1 unrouted)
ADC4+  (1 unrouted)
ADC4-  (1 unrouted)
ADC5+  (1 unrouted)
ADC5-  (1 unrouted)
ADC6+  (1 unrouted)
ADC6-  (1 unrouted)
ADC7+  (1 unrouted)
ADC7-  (1 unrouted)
ADC8+  (1 unrouted)
ADC8-  (1 unrouted)
FTDI2_3V3  (1 unrouted)
FTDI2_CBUS1  (1 unrouted)
FTDI2_RE  (2 unrouted)
FTDI2_RXD  (1 unrouted)
FTDI2_TE  (1 unrouted)
FTDI2_TXD  (1 unrouted)
FTDI_3V3  (7 unrouted)
FTID2_CBUS2  (1 unrouted)
GND  (142 unrouted)
GNDA  (10 unrouted)
ID_SC  (2 unrouted)
ID_SD  (2 unrouted)
LOPY_3V3  (12 unrouted)
LOPY_CS1  (1 unrouted)
LOPY_CS2  (1 unrouted)
LOPY_MISO  (4 unrouted)
LOPY_MOSI  (2 unrouted)
LOPY_P2  (2 unrouted)
LOPY_P15  (2 unrouted)
LOPY_P16  (2 unrouted)
LOPY_P17  (2 unrouted)
LOPY_P18  (2 unrouted)
LOPY_P19  (2 unrouted)
LOPY_P20  (2 unrouted)
LOPY_P21  (2 unrouted)
LOPY_P22  (2 unrouted)
LOPY_P23  (2 unrouted)
LOPY_RX0  (2 unrouted)
LOPY_RX1  (1 unrouted)
LOPY_SCL/CLK  (3 unrouted)
LOPY_SDA  (1 unrouted)
LOPY_TX0  (2 unrouted)
LOPY_TX1  (1 unrouted)
LOPY_USB_5V  (8 unrouted)
N$1  (1 unrouted)
N$4  (1 unrouted)
N$5  (2 unrouted)
N$6  (1 unrouted)
N$7  (1 unrouted)
N$8  (2 unrouted)
N$9  (1 unrouted)
N$10  (1 unrouted)
N$11  (1 unrouted)
N$12  (2 unrouted)
N$13  (2 unrouted)
N$14  (2 unrouted)
N$15  (2 unrouted)
N$16  (2 unrouted)
N$17  (1 unrouted)
N$19  (2 unrouted)
N$22  (2 unrouted)
N$23  (2 unrouted)
N$24  (2 unrouted)
N$25  (1 unrouted)
N$26  (2 unrouted)
N$27  (2 unrouted)
N$28  (1 unrouted)
N$29  (1 unrouted)
N$30  (1 unrouted)
N$31  (2 unrouted)
N$32  (1 unrouted)
N$33  (1 unrouted)
N$34  (1 unrouted)
N$35  (2 unrouted)
N$36  (2 unrouted)
N$37  (2 unrouted)
N$38  (1 unrouted)
N$39  (2 unrouted)
N$40  (2 unrouted)
N$41  (1 unrouted)
N$42  (1 unrouted)
N$43  (1 unrouted)
N$44  (1 unrouted)
N$45  (1 unrouted)
N$46  (1 unrouted)
N$47  (1 unrouted)
N$48  (1 unrouted)
N$49  (1 unrouted)
N$50  (1 unrouted)
N$51  (1 unrouted)
N$52  (1 unrouted)
N$53  (1 unrouted)
N$54  (1 unrouted)
N$55  (1 unrouted)
N$56  (1 unrouted)
N$57  (1 unrouted)
N$58  (1 unrouted)
N$59  (1 unrouted)
N$60  (1 unrouted)
N$61  (1 unrouted)
N$62  (1 unrouted)
N$63  (2 unrouted)
N$64  (2 unrouted)
N$65  (2 unrouted)
N$66  (1 unrouted)
N$67  (1 unrouted)
N$68  (1 unrouted)
N$69  (1 unrouted)
N$70  (1 unrouted)
N$71  (1 unrouted)
N$72  (1 unrouted)
N$73  (1 unrouted)
N$74  (1 unrouted)
N$75  (1 unrouted)
N$76  (1 unrouted)
N$77  (1 unrouted)
N$78  (1 unrouted)
N$79  (1 unrouted)
N$80  (3 unrouted)
N$81  (3 unrouted)
N$82  (1 unrouted)
N$83  (3 unrouted)
N$84  (1 unrouted)
N$85  (1 unrouted)
N$86  (3 unrouted)
N$87  (1 unrouted)
N$88  (1 unrouted)
N$89  (1 unrouted)
N$90  (1 unrouted)
N$91  (1 unrouted)
N$92  (1 unrouted)
N$93  (1 unrouted)
N$94  (2 unrouted)
N$95  (2 unrouted)
N$96  (2 unrouted)
N$97  (3 unrouted)
N$98  (1 unrouted)
N$99  (2 unrouted)
N$100  (1 unrouted)
N$101  (1 unrouted)
N$102  (1 unrouted)
N$103  (1 unrouted)
N$104  (1 unrouted)
N$105  (1 unrouted)
N$106  (1 unrouted)
N$107  (1 unrouted)
N$108  (1 unrouted)
N$109  (1 unrouted)
N$110  (1 unrouted)
N$111  (1 unrouted)
N$112  (1 unrouted)
N$113  (1 unrouted)
N$114  (1 unrouted)
N$115  (1 unrouted)
N$116  (1 unrouted)
N$117  (1 unrouted)
N$118  (1 unrouted)
N$119  (1 unrouted)
N$120  (1 unrouted)
N$121  (1 unrouted)
N$122  (1 unrouted)
N$123  (2 unrouted)
N$124  (1 unrouted)
N$125  (1 unrouted)
N$126  (1 unrouted)
N$127  (1 unrouted)
N$128  (1 unrouted)
PI_5V  (48 unrouted)
PI_PWR_CTRL  (3 unrouted)
RPI_CS1  (1 unrouted)
RPI_CS2  (1 unrouted)
RPI_CS3  (1 unrouted)
RPI_CS4  (1 unrouted)
RPI_CS5  (1 unrouted)
RPI_CS6  (1 unrouted)
RPI_CS7  (1 unrouted)
RPI_CS8  (1 unrouted)
RS485_A  (1 unrouted)
RS485_B  (1 unrouted)
RS485_DM  (1 unrouted)
RS485_DP  (1 unrouted)
RTC_BATT  (2 unrouted)
SCL_3V3  (15 unrouted)
SDA_3V3  (15 unrouted)
SPI0_CS0  (1 unrouted)
SPI0_CS1  (1 unrouted)
SPI_GPIO1  (1 unrouted)
SPI_GPIO2  (1 unrouted)
SPI_GPIO3  (1 unrouted)
SPI_GPIO4  (1 unrouted)
SPI_MISO  (8 unrouted)
SPI_MOSI  (8 unrouted)
SPI_SCLK  (8 unrouted)
UART1_DM  (1 unrouted)
UART1_DP  (1 unrouted)
UART1_RDX  (1 unrouted)
UART1_TDX  (1 unrouted)
UART2_DM  (1 unrouted)
UART2_DP  (1 unrouted)
UART2_RDX  (1 unrouted)
UART2_TDX  (1 unrouted)
UART3_DM  (1 unrouted)
UART3_DP  (1 unrouted)
UART3_RDX  (1 unrouted)
UART3_TDX  (1 unrouted)
UART_RX  (1 unrouted)
UART_TDX  (1 unrouted)
USB_DM  (1 unrouted)
USB_DP  (1 unrouted)
USB_HUB_DM  (1 unrouted)
USB_HUB_DP  (1 unrouted)
USB_HUB_VD33_O  (3 unrouted)
VBUS  (2 unrouted)
X1_RTC  (2 unrouted)
X2_RTC  (2 unrouted)